# Altium PCB FlightController_Bottom.PcbDoc
Units mm, origin at the board's own origin, x right, y up, seen from the top; angles counter-clockwise.
Board outline 62.23 x 70.48 mm, 2 copper layers (Top Layer, Bottom Layer); 22 components, 39 nets, 124 pads, 48 vias.
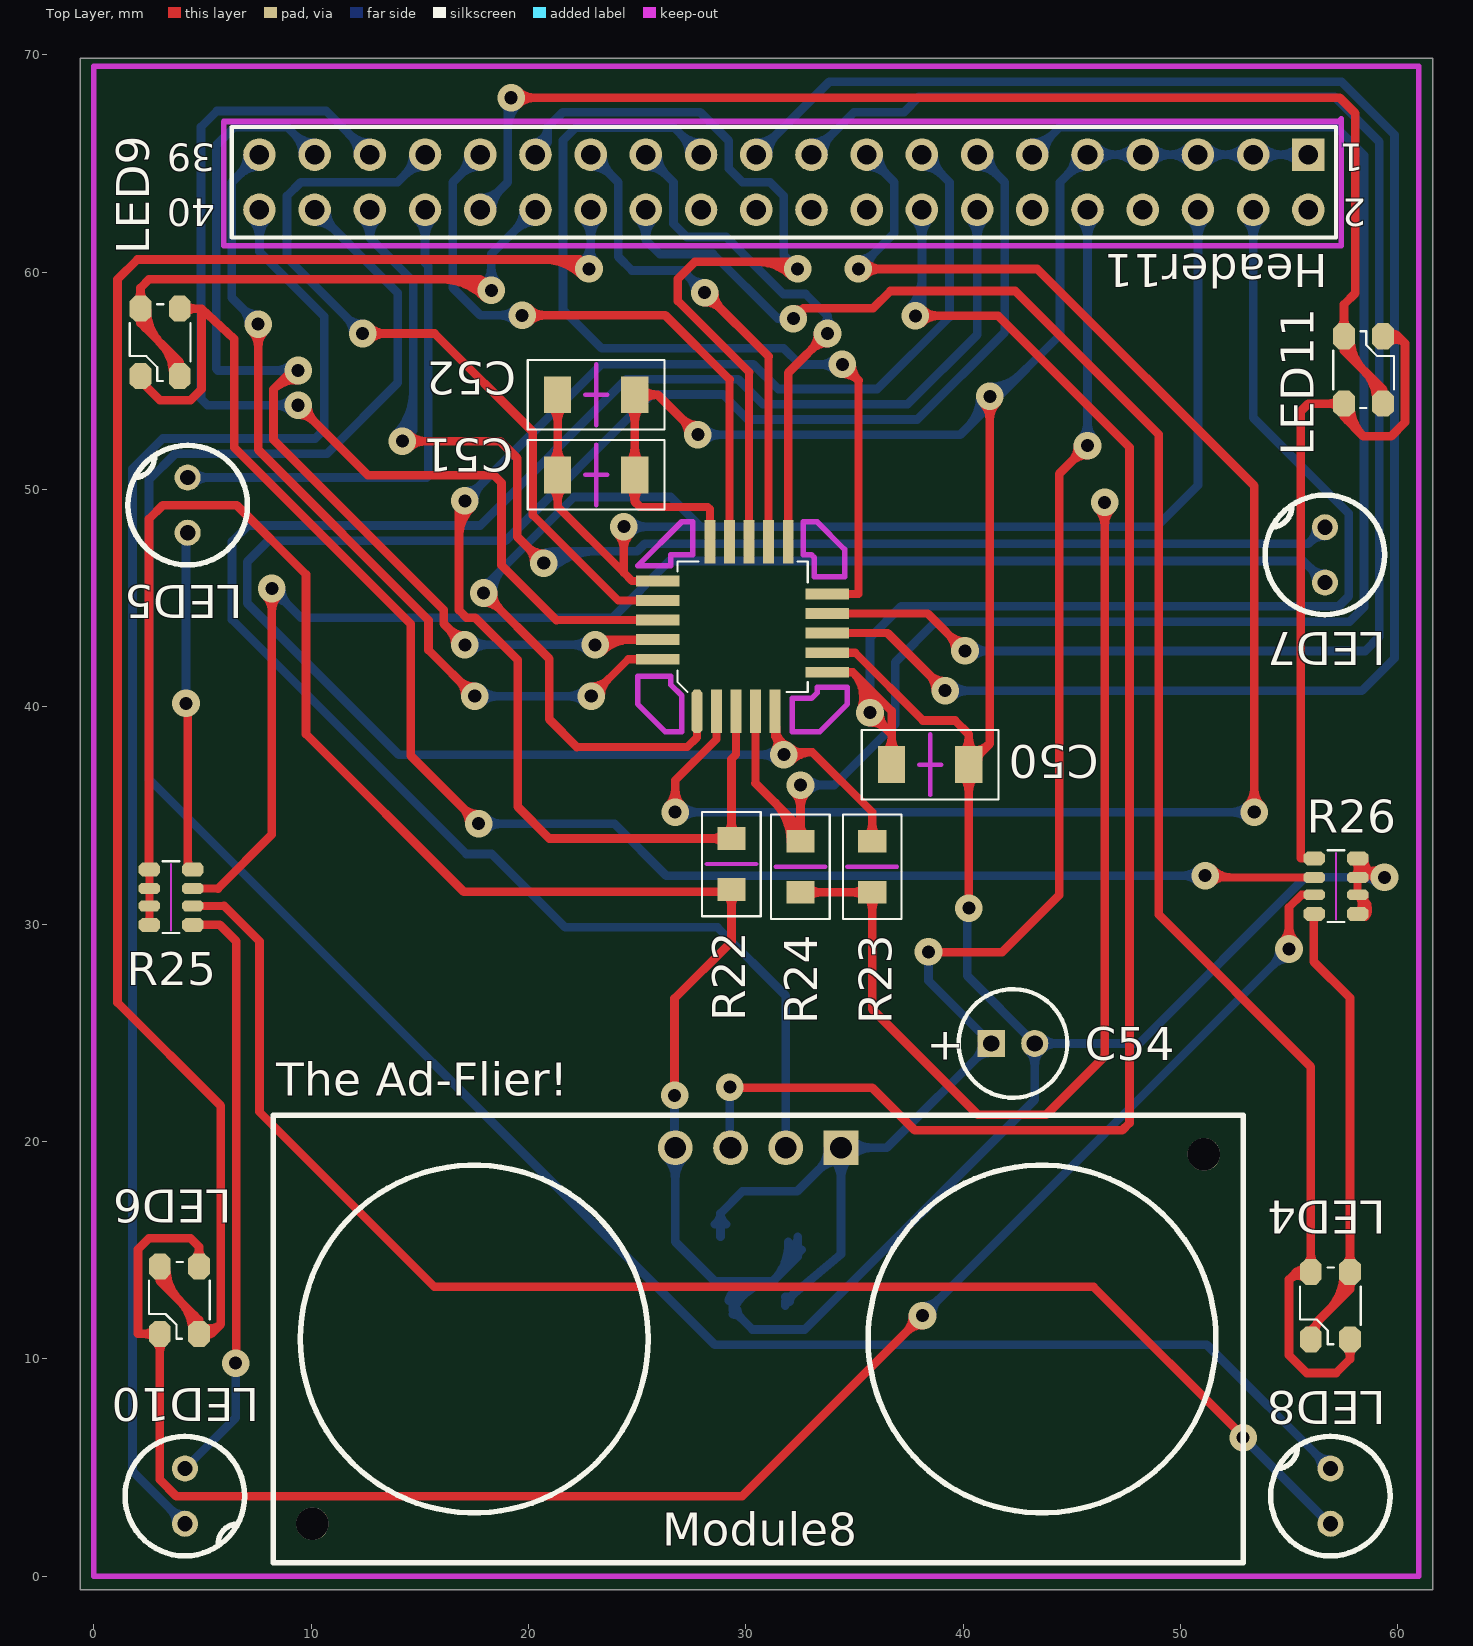
[diagram p0: Top Layer view]
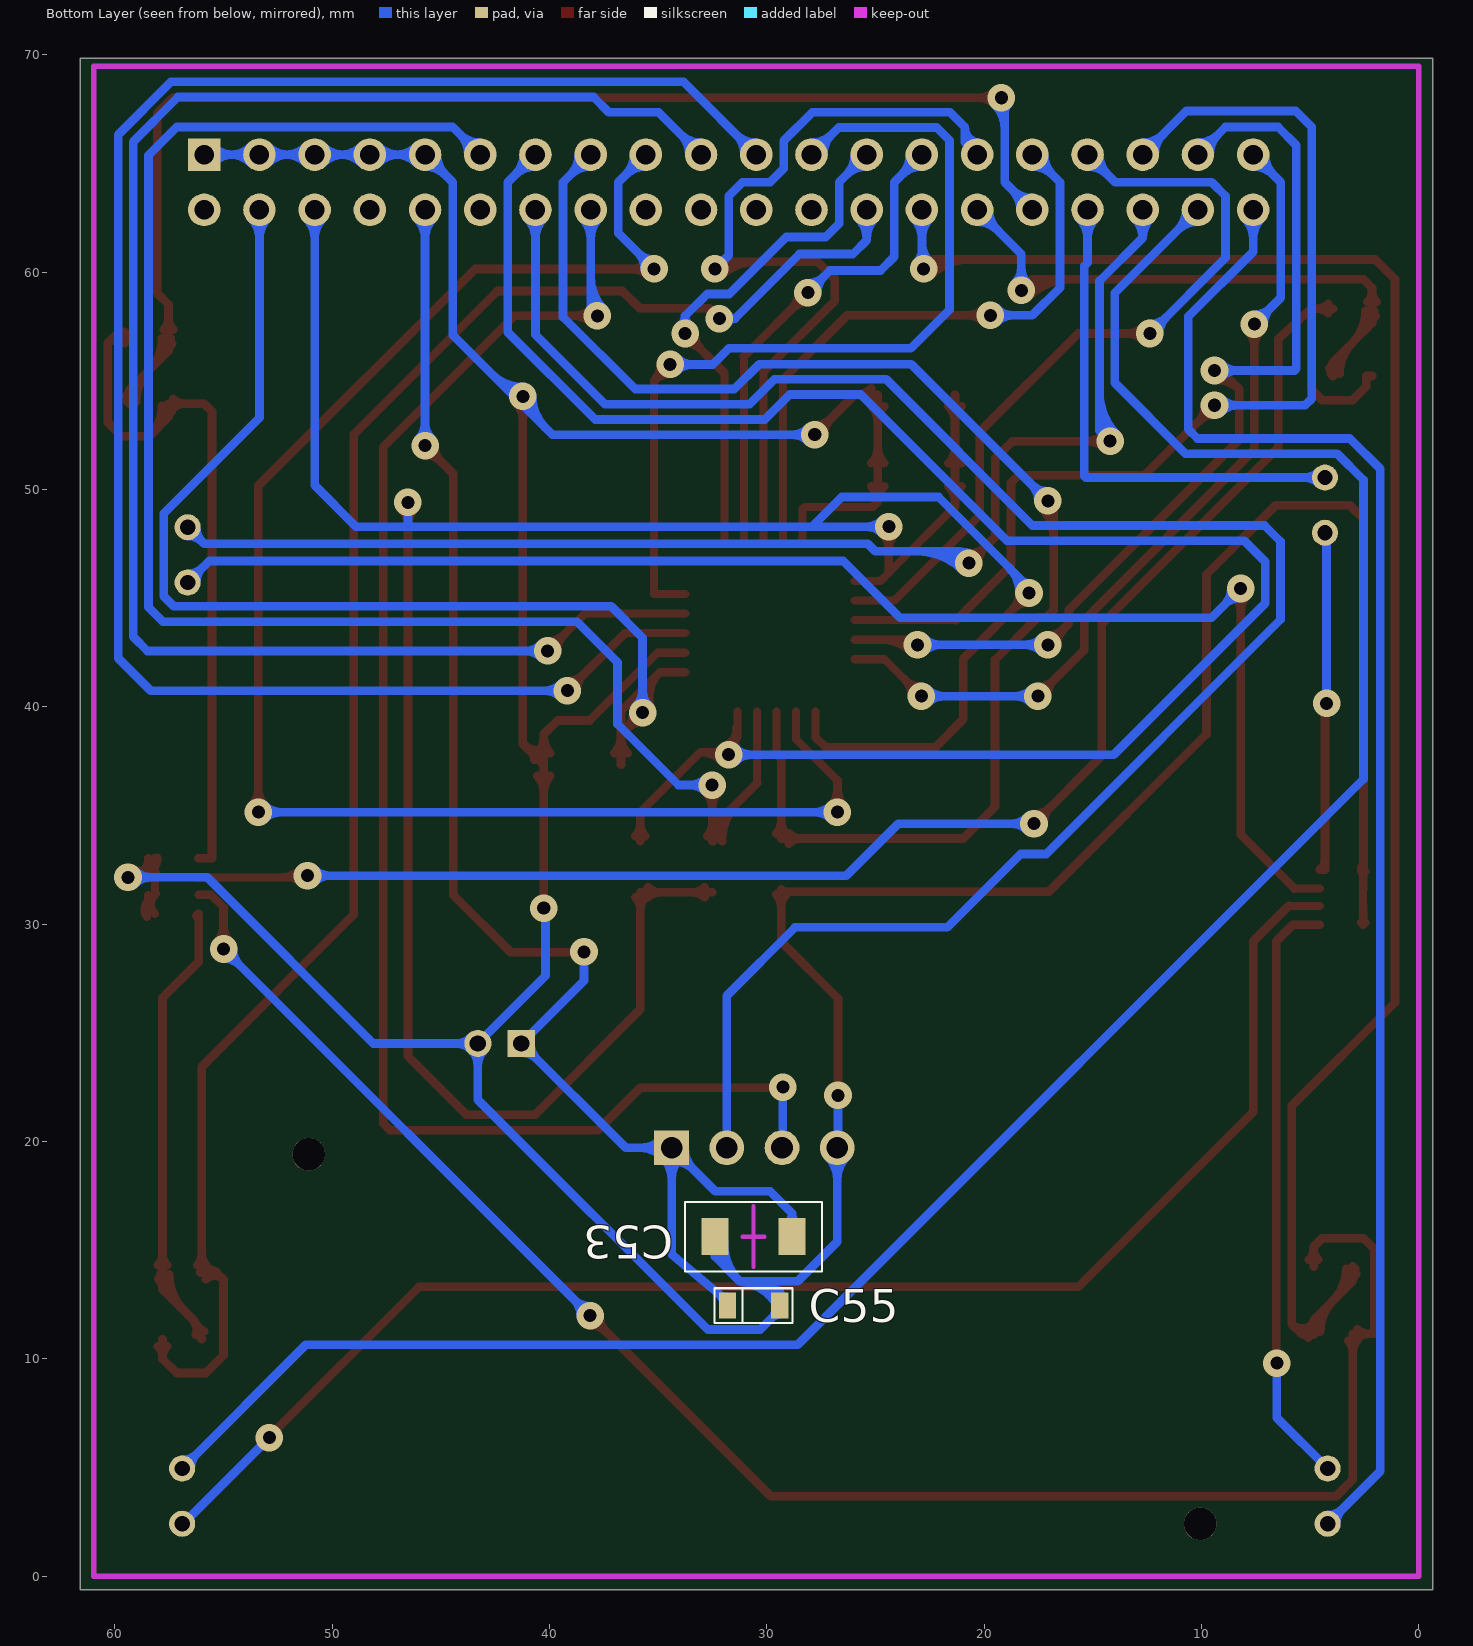
[diagram p1: Bottom Layer view, seen from below]

## Layer stack, top to bottom
Top Layer: signal copper 0.0356
Dielectric: dielectric 0.32, FR-4, Dk 4.8
Bottom Layer: signal copper 0.0356

## Board outline
-0.635,-0.635 -0.635,69.85 61.595,69.85 61.595,-0.635

## Design rules (kind name [scope] priority, off if disabled: settings)
Clearance "Via Clearance" [IsVia vs IsComponent] p1: gap=1
Clearance [All] p2: gap=0.3
ComponentClearance [All] p1: gap=0.254 collisioncheckmode=3 verticalgap=0.254 showdistances=TRUE
PolygonConnect [All] p1: connectstyle=Relief reliefconductorwidth=0.254 reliefentries=4 polygonreliefangle="90 Angle"
RoutingPriority RoutingPriority_CameraDataLines [InNet('/CAMERA_DCLK')] p1: routingpriority=1
RoutingPriority [All] p2: routingpriority=0
RoutingVias [All] p1: holewidth=1 width=1.27 viastyle="Through Hole" minholewidth=1 minwidth=1.27 maxholewidth=1 maxwidth=1.27
SMDNeckDown [All] p1: percent=75.000
SilkscreenOverComponentPads [All] p1: minsilkscreentomaskgap=0.254
SolderMaskExpansion [All] p1: expansion=0.05
Width [All] p1: maxlimit=0.5 minlimit=0.3 preferedwidth=0.4 minimp=50.000000 maximp=50.000000 favimp=50.000000
25 further rules are at their usual default settings.

## Components (designator, comment, footprint, x,y, rotation, side; value= is the part's Value field where it differs from the comment)
C50 "0.1uF SMD 1206" "SMD 1206" 38.481,37.338 r0 top
C51 "0.1uF SMD 1206" "SMD 1206" 23.114,50.673 r0 top
C52 "0.1uF SMD 1206" "SMD 1206" 23.114,54.356 r0 top
C53 "0.1uF SMD 1206" "SMD 1206" 30.607,15.621 r180 bottom
C54 "10uF Electrolitic" CAPPR2-5x5 42.291,24.511 r0 top
C55 "1.0uF Low-ESR Tantalum CaseA" "CAPACITOR - TANTALUM CASE A" 30.607,12.446 r180 bottom
Header11 "Header 20X2H" HDR2X20 55.88,65.405 r180 top
LED4 "LED PLCC-4" "PLCC-4 LED" 56.896,12.446 r90 top
LED5 "LED Blue Through-Hole" "BLUE LED" 4.318,49.276 r90 top
LED6 "LED PLCC-4" "PLCC-4 LED" 3.937,12.7 r90 top
LED7 "LED Blue Through-Hole" "BLUE LED" 56.642,46.99 r90 top
LED8 "LED Blue Through-Hole" "BLUE LED" 56.896,3.683 r90 top
LED9 "LED PLCC-4" "PLCC-4 LED" 3.048,56.769 r90 top
LED10 "LED Blue Through-Hole" "BLUE LED" 4.191,3.683 r270 top
LED11 "LED PLCC-4" "PLCC-4 LED" 58.42,55.499 r270 top
Module8 "HC-SR04 Ultrasonic Module" "HC-SR04 ULTRASONIC RANGER" 8.255,21.209 r0 top
R22 "4.7K SMD 0805" "SMD 0805" 29.337,32.766 r90 top
R23 "4.7K SMD 0805" "SMD 0805" 35.814,32.639 r90 top
R24 "4.7K SMD 0805" "SMD 0805" 32.512,32.639 r270 top
R25 "Value: 10K SMD Resistor Array" "RESISTOR ARRAY YC164" 3.556,31.242 r180 top
R26 "Value: 10K SMD Resistor Array" "RESISTOR ARRAY YC164" 57.15,31.75 r0 top
"The Ad-Flier!" "TCM8230MD" "TCM8230MD CAMERA MODULE" 29.848,43.688 r90 top (schematic designator Module7)

## Footprints (in the part's own frame and the unit in brackets; to place one, negate y for a bottom-side part, rotate by r counter-clockwise, add the part's x,y. Pads: shape width x height; smd on the part's side, far side on the other; paste and mask are expansions set on the pad)
"BLUE LED" [mm]
  round 1.2 hole 0.7: N(-1.27,0) P(1.27,0)
  Mechanical 1 keep-out circle w0.254: c0,0 r2.75
  silkscreen extent -2.75,-2.75 2.75,2.75
"CAPACITOR - TANTALUM CASE A" [mm]
  rect 0.8x1.2 smd: 1(-1.2,0) 2(1.2,0)
  silkscreen extent -1.8,-0.8 1.8,0.8
CAPPR2-5x5 [mm] "Capacitor, Electrolytic, Radial; Body 5 x 5 mm (Dia.xH typ); Pin Spacing 2 mm (typ)"
  rect 1.25x1.25 hole 0.75: 1(-1,0)
  round 1.25 hole 0.75: 2(1,0)
  silkscreen extent -2.5,-2.5 2.5,2.5
"HC-SR04 ULTRASONIC RANGER" [mm]
  rect 1.6x1.6 hole 1: 1(26.12,-1.5)
  round 1.6 hole 1: 2(23.58,-1.5) 3(21.04,-1.5) 4(18.5,-1.5)
  round 1.5 hole 1.5: NC(1.8,-18.8) NC(42.82,-1.8)
  silkscreen extent 0,-20.6 44.62,0
HDR2X20 [mm] "Connector; Header; 20x2 Position"
  rect 1.5x1.5 hole 0.9: 1(0,0)
  round 1.5 hole 0.9: 2(0,2.54) 3(2.54,0) 4(2.54,2.54) 5(5.08,0) 6(5.08,2.54) 7(7.62,0) 8(7.62,2.54) 9(10.16,0) 10(10.16,2.54) 11(12.7,0) 12(12.7,2.54) 13(15.24,0) 14(15.24,2.54) 15(17.78,0) 16(17.78,2.54) 17(20.32,0) 18(20.32,2.54) 19(22.86,0) 20(22.86,2.54) 21(25.4,0) 22(25.4,2.54) 23(27.94,0) 24(27.94,2.54) 25(30.48,0) 26(30.48,2.54) 27(33.02,0) 28(33.02,2.54) 29(35.56,0) 30(35.56,2.54) 31(38.1,0) 32(38.1,2.54) 33(40.64,0) 34(40.64,2.54) 35(43.18,0) 36(43.18,2.54) 37(45.72,0) 38(45.72,2.54) 39(48.26,0) 40(48.26,2.54)
  silkscreen extent -1.27,-1.27 49.53,3.81
"PLCC-4 LED" [mm]
  oct 1.2x1 smd: 1(-1.55,0.9) 2(1.55,0.9) 3(-1.55,-0.9) 4(1.55,-0.9)
  silkscreen extent -1.78,-1.4 1.75,1.4
"RESISTOR ARRAY YC164" [mm]
  oct 1x0.65 smd: 1(-1,1.275) 4(-1,-1.275) 5(1,-1.275) 8(1,1.275)
  oct 1x0.5 smd: 2(-1,0.4) 3(-1,-0.4) 6(1,-0.4) 7(1,0.4)
  Top Layer keep-out lines w0.1: 0,1.524 0,-1.524
  Mechanical 1 keep-out lines w0.1: 1.905,1.905 1.905,-1.905 -1.905,-1.905 -1.905,1.905 1.905,1.905
  silkscreen extent -0.38,-1.65 0.38,1.65
"SMD 0805" [mm]
  rect 1.05x1.3 smd: 1(-1.175,0) 2(1.175,0)
  Top Layer keep-out lines w0.2: 0,1.143 0,-1.143
  Mechanical 1 keep-out lines w0.1: -2.4,1.35 -2.4,0 -2.4,-1.35 2.4,-1.35 2.4,1.35 -2.4,1.35
  silkscreen extent -2.4,-1.35 2.4,1.35
"SMD 1206" [mm]
  rect 1.25x1.7 smd: 1(-1.775,0) 2(1.775,0)
  Top Layer keep-out lines w0.2: -0.508,0 0.508,0 ; 0,-1.397 0,1.397
  Mechanical 1 keep-out lines w0.1: -3.15,-1.6 -3.15,0 -3.15,1.6 3.15,1.6 3.15,-1.6 -3.15,-1.6
  silkscreen extent -3.15,-1.6 3.15,1.6
"TCM8230MD CAMERA MODULE" [mm]
  oct 2x0.5 smd: 1(-3.9,2.1)
  rect 2x0.5 smd: 2(-3.9,1.2) 3(-3.9,0.3) 4(-3.9,-0.6) 5(-3.9,-1.5) 11(3.9,-2.1) 12(3.9,-1.2) 13(3.9,-0.3) 14(3.9,0.6) 15(3.9,1.5)
  rect 0.5x2 smd: 6(-2.1,-3.9) 7(-1.2,-3.9) 8(-0.3,-3.9) 9(0.6,-3.9) 10(1.5,-3.9) 16(2.1,3.9) 17(1.2,3.9) 18(0.3,3.9) 19(-0.6,3.9) 20(-1.5,3.9)
  silkscreen extent -3,-3 3,3

## Part data
C50 C51 C52 C53: library part Cap, "Capacitor"
C54: library part "Cap Pol1", "Polarized Capacitor (Radial)"
C55: library part SMD_Cap_Tantalum, "Tantalum Capacitor - Case A"
Header11: "Header, 20-Pin, Dual row, Right Angle"
LED4 LED6 LED9 LED11: library part HSMF-C157, "Surface Mount Chip LED"
LED5 LED7 LED8 LED10: library part LED0, "Typical INFRARED GaAs LED"
R22 R23 R24: library part Res2, "Resistor"
R25 R26: library part "SMD Resistor Array", "4-Count Resistor Array"
"The Ad-Flier!": "Toshiba 640x480 Camera"

## Via types
v1: diameter 1.27, hole 0.6, Top Layer to Bottom Layer, 48 vias

## Nets (pads, with @x,y where several pads share a name; then routed paths per layer and width w, separated by ;. In a path a pad name is that pad's centre, name@x,y a point inside that pad or via, vN(x,y) a via of type N, cw(c..) or ccw(c..) an arc to the next point about the centre after c; other vN are vias at no path point)
/+1.2V: Header11.2
/+1.5V: "The Ad-Flier!.6" C50.1 Header11.4 | length 65.1
  Top Layer w0.375: 33.748,41.588 34.925,41.588 ; v1@35.293,39.886 ccw(c33.788,40.451) 34.925,41.588 ; 35.337,41.176 cw(c34.387,40.226) v1@35.645,39.754 ; 35.748,40.765 cw(c34.985,40.002) v1@35.996,39.622 ; 36.706,39.807 34.925,41.588
  Top Layer w0.4: v1@35.712,39.294 cw(c35.712,38.243) 36.455,38.986 cw(c37.198,39.729) v1@36.147,39.729 ; v1(35.712,39.729) 36.706,38.735 ; C50.1@36.405,37.864 ccw(c35.68,38.589) 36.706,38.589 ccw(c37.732,38.589) C50.1@37.007,37.864 ; C50.1 36.706,38.735 ; 36.706,39.807 36.706,38.735
  Bottom Layer w0.4: v1@35.405,40.036 ccw(c34.662,40.779) 35.712,40.779 ccw(c36.763,40.779) v1@36.02,40.036 ; v1(35.712,39.729) 35.712,43.18 37.152,44.62 57.277,44.62 57.742,45.085 57.742,48.895 53.34,53.297 Header11.4 ; Header11.4@52.951,62.476 cw(c52.012,61.537) 53.34,61.537 cw(c54.668,61.537) Header11.4@53.729,62.476
/+2.8V: "The Ad-Flier!.1" "The Ad-Flier!.16" C51.1 C52.1 Header11.6 R23.1 R24.2 | length 149.4
  Top Layer w0.375: 21.339,49.214 24.384,46.169 ; 22.225,38.151 27.305,38.151 27.748,38.594 27.748,39.788 ; v1@24.068,47.969 cw(c23.304,47.205) 24.384,47.205 cw(c25.464,47.205) v1@24.7,47.969 ; v1(24.384,48.285) 24.384,46.169 ; 25.948,45.788 24.765,45.788 24.384,46.169
  Top Layer w0.4: v1@17.932,44.802 cw(c17.932,43.752) 18.675,44.495 cw(c19.418,45.237) v1@18.367,45.237 ; v1(17.932,45.237) 20.955,42.215 20.955,39.421 22.225,38.151 ; C51.1@21.038,50.147 cw(c20.313,49.422) 21.339,49.422 cw(c22.365,49.422) C51.1@21.64,50.147 ; C51.1@21.038,51.199 ccw(c20.313,51.924) 21.339,51.924 ccw(c22.365,51.924) C51.1@21.64,51.199 ; C52.1@21.038,53.83 cw(c20.313,53.105) 21.339,53.105 cw(c22.365,53.105) C52.1@21.64,53.83 ; 21.339,49.214 C51.1 C52.1 ; R24.2 R23.1 35.814,26.086 40.665,21.234 43.815,21.234 46.507,23.927 v1(46.507,49.403) ; R24.2@32.867,31.234 cw(c33.422,30.679) 33.422,31.464 cw(c33.422,32.249) R24.2@32.867,31.694 ; R23.1@35.459,31.234 ccw(c34.904,30.679) 34.904,31.464 ccw(c34.904,32.249) R23.1@35.459,31.694 ; R23.1@35.584,31.234 cw(c35.029,30.679) 35.814,30.679 cw(c36.599,30.679) R23.1@36.044,31.234 ; v1@46.2,49.095 cw(c45.457,48.353) 46.507,48.353 cw(c47.558,48.353) v1@46.815,49.095
  Bottom Layer w0.4: v1(17.932,45.237) 17.932,45.493 22.096,49.657 26.543,49.657 27.915,48.285 ; v1@17.932,45.672 ccw(c17.932,46.105) 18.238,45.799 ; v1@18.367,45.237 cw(c20.035,45.237) 18.856,46.417 ; v1(24.384,48.285) 27.915,48.285 ; v1@24.692,47.978 cw(c25.434,47.235) 25.434,48.285 cw(c25.434,49.336) v1@24.692,48.593 ; 46.507,48.311 v1(46.507,49.403) ; Header11.6@50.411,62.476 cw(c49.472,61.537) 50.8,61.537 cw(c52.128,61.537) Header11.6@51.189,62.476 ; Header11.6 50.8,50.19 48.895,48.285 27.915,48.285
/+3.3V: Header11.8
/+5.0V: C53.2 C54.1 C55.1 Header11.10 Module8.1 | length 85.6
  Top Layer w0.4: v1@38.354,28.702 41.783,28.702 44.425,31.344 44.425,50.724 v1(45.72,52.019) ; v1@45.285,52.019 cw(c44.235,52.019) 44.977,51.277 cw(c45.72,50.534) v1@45.72,51.584
  Bottom Layer w0.4: C53.2@28.579,16.187 ccw(c28.205,16.691) 28.832,16.691 ; C53.2 28.832,16.691 ; C53.2@29.085,16.187 cw(c29.459,16.691) 28.832,16.691 ; C55.1 31.807,12.649 34.375,14.817 Module8.1 ; C55.1@31.824,12.845 ccw(c31.864,13.318) C55.1@32.17,12.956 ; C55.1@32.006,12.629 cw(c32.496,12.588) C55.1@32.179,12.963 ; Module8.1@33.775,19.709 cw(c32.326,19.709) 33.351,18.685 cw(c34.375,17.66) Module8.1@34.375,19.109 ; Module8.1@33.951,19.285 cw(c32.926,18.26) 34.375,18.26 cw(c35.824,18.26) 34.799,19.285 cw(c35.824,18.26) 35.824,19.709 cw(c35.824,21.158) Module8.1@34.799,20.133 ; v1(38.405,28.727) 38.405,27.397 C54.1 36.489,19.709 Module8.1 ; C54.1@40.866,24.511 cw(c39.84,24.511) 40.565,23.785 cw(c41.291,23.06) C54.1@41.291,24.086 ; Header11.10@45.331,62.476 cw(c44.392,61.537) 45.72,61.537 cw(c47.048,61.537) Header11.10@46.109,62.476 ; v1@45.412,52.327 ccw(c44.67,53.069) 45.72,53.069 ccw(c46.77,53.069) v1@46.028,52.327 ; v1(45.72,52.019) Header11.10 ; 28.832,16.691 29.845,17.704 32.37,17.704 Module8.1
/BLED_BLUE1: Header11.34 LED5.P | length 27
  Bottom Layer w0.4: LED5.P 15.316,50.546 15.39,50.62 15.39,60.285 15.24,60.435 Header11.34 ; LED5.P@4.601,50.263 cw(c5.284,49.58) 5.284,50.546 cw(c5.284,51.512) LED5.P@4.601,50.829 ; Header11.34@14.851,62.476 cw(c13.912,61.537) 15.24,61.537 cw(c16.568,61.537) Header11.34@15.629,62.476
/BLED_BLUE2: Header11.36 LED7.P | length 74.1
  Top Layer w0.4: v1(14.199,52.222) 18.694,52.222 19.482,51.435 19.482,47.828 v1(20.701,46.609) ; v1@14.506,51.915 cw(c15.249,51.172) 15.249,52.222 cw(c15.249,53.273) v1@14.506,52.53 ; v1@20.266,46.609 ccw(c19.216,46.609) 19.958,47.352 ccw(c20.701,48.094) v1@20.701,47.044
  Bottom Layer w0.4: Header11.36@12.32,62.467 cw(c11.47,61.578) 12.7,61.578 ; Header11.36 12.7,61.578 ; Header11.36@13.08,62.467 ccw(c13.93,61.578) 12.7,61.578 ; v1@13.891,52.53 ccw(c11.962,54.459) 14.69,54.459 ; v1@14.174,52.247 ccw(c12.928,53.493) 14.69,53.493 ; v1(14.199,52.222) 14.69,52.714 14.69,59.588 12.7,61.578 ; v1@20.443,46.867 cw(c21.127,46.183) 21.127,47.15 ; v1(20.701,46.609) 21.242,47.15 25.002,47.15 25.349,47.498 55.88,47.498 LED7.P ; v1@20.726,46.584 cw(c22.092,45.218) 22.092,47.15 ; v1@21.009,46.301 cw(c23.058,44.252) 23.058,47.15 ; LED7.P@56.242,48.26 cw(c55.276,48.26) 55.959,47.577 cw(c56.642,46.894) LED7.P@56.642,47.86
/BLED_BLUE3: Header11.38 LED8.P | length 107.7
  Bottom Layer w0.4: Header11.38@10.16,62.315 cw(c10.16,60.987) 11.099,61.926 cw(c12.038,62.865) Header11.38@10.71,62.865 ; Header11.38 13.99,59.035 13.99,54.907 10.729,51.646 3.746,51.646 2.54,50.44 2.54,36.678 28.572,10.646 51.203,10.646 LED8.P ; LED8.P@56.496,4.953 ccw(c55.53,4.953) 56.213,5.636 ccw(c56.896,6.319) LED8.P@56.896,5.353
/BLED_BLUE4: Header11.40 LED10.P | length 74
  Bottom Layer w0.4: LED10.P@3.791,2.413 ccw(c2.825,2.413) 3.508,3.096 ccw(c4.191,3.779) LED10.P@4.191,2.813 ; LED10.P 1.778,4.826 1.778,50.949 3.175,52.346 10.182,52.346 10.6,52.764 10.6,57.955 7.62,60.935 Header11.40 ; Header11.40@7.231,62.476 cw(c6.292,61.537) 7.62,61.537 cw(c8.948,61.537) Header11.40@8.009,62.476
/BLED_ORANGE1: Header11.26 LED4.2 LED4.3 | length 88.7
  Top Layer w0.4: v1(32.182,57.861) 32.651,58.331 ; v1@32.341,58.266 ccw(c32.447,58.535) 32.651,58.331 ; v1@32.587,58.02 cw(c32.856,58.126) 32.651,58.331 ; 55.289,13.95 cw(c55.686,13.553) LED4.2@56.063,13.97 ; LED4.2@55.77,13.798 ccw(c55.335,13.417) 55.335,13.996 ccw(c55.335,14.575) LED4.2@55.77,14.194 ; LED4.2@55.784,14.308 ccw(c55.272,14.82) 55.996,14.82 ccw(c56.72,14.82) LED4.2@56.208,14.308 ; LED4.2@55.795,13.673 ccw(c55.404,13.24) 54.991,13.653 ; LED4.3@57.584,10.584 cw(c57.072,10.072) 57.796,10.072 cw(c58.52,10.072) LED4.3@58.008,10.584 ; LED4.3 57.796,9.993 57.15,9.347 55.804,9.347 54.991,10.16 54.991,13.652 ; 32.651,58.331 35.848,58.331 36.652,59.135 42.389,59.135 48.997,52.527 48.997,30.444 55.996,23.444 LED4.2 55.335,13.996 54.991,13.652
  Bottom Layer w0.4: Header11.26@25.011,62.476 cw(c24.072,61.537) 25.4,61.537 cw(c26.728,61.537) Header11.26@25.789,62.476 ; Header11.26 25.4,61.468 26.035,60.833 28.491,60.833 31.463,57.861 ; v1@31.797,57.659 ccw(c31.463,57.484) 31.463,57.861 ; v1@31.797,58.063 cw(c31.463,58.238) 31.463,57.861 ; v1(32.182,57.861) 31.463,57.861
/BLED_ORANGE2: Header11.28 LED6.2 LED6.3 | length 95.8
  Top Layer w0.4: LED6.2@2.869,13.901 cw(c2.656,13.586) 3.037,13.586 ; LED6.2@2.937,14.15 ccw(c4.058,14.15) 3.265,13.357 ; LED6.2 3.037,13.586 ; LED6.2@3.205,13.901 ccw(c3.418,13.586) 3.037,13.586 ; LED6.2@3.337,14.15 ccw(c5.424,14.15) 3.948,12.674 ; 3.946,12.676 cw(c2.52,11.25) LED6.3@4.537,11.25 ; 4.629,11.994 cw(c3.885,11.25) LED6.3@4.937,11.25 ; LED6.3@4.68,11.506 ccw(c4.509,11.786) 4.837,11.786 ; LED6.3@4.783,11.166 ccw(c5.089,11.644) 5.49,11.243 ; LED6.3@4.994,11.506 cw(c5.165,11.786) 4.837,11.786 ; LED6.3@4.999,11.503 ccw(c5.363,12.073) 5.842,11.594 ; LED6.3@5.087,10.984 cw(c5.397,10.776) 5.397,11.15 ; LED6.3@5.087,11.316 ccw(c5.397,11.523) 5.397,11.15 ; 20.691,60.579 cw(c20.691,58.055) v1@22.476,59.84 ; 21.657,60.579 cw(c21.657,59.02) v1@22.759,60.122 ; v1(22.784,60.147) 22.352,60.579 2.007,60.579 1.092,59.665 1.092,26.391 5.842,21.641 5.842,11.594 ; 3.037,13.586 4.837,11.786 ; 4.837,11.786 LED6.3 5.397,11.15 ; 5.397,11.15 5.842,11.594
  Bottom Layer w0.4: Header11.28@22.471,62.476 cw(c21.532,61.537) 22.86,61.537 cw(c24.188,61.537) Header11.28@23.249,62.476 ; v1@22.476,60.455 ccw(c21.55,61.381) 22.86,61.381 ; v1(22.784,60.147) 22.86,60.223 Header11.28 ; 22.86,61.013 ccw(c23.65,61.013) v1@23.091,60.455
/BLED_ORANGE3: Header11.30 LED9.2 LED9.3 | length 41.5
  Top Layer w0.4: LED9.2@1.936,58.631 ccw(c1.424,59.143) 2.148,59.143 ccw(c2.872,59.143) LED9.2@2.36,58.631 ; LED9.2@1.98,57.97 cw(c1.767,57.655) 2.148,57.655 ; LED9.2@2.048,58.219 ccw(c3.169,58.219) 2.376,57.426 ; LED9.2@2.316,57.97 ccw(c2.529,57.655) 2.148,57.655 ; LED9.2@2.448,58.219 ccw(c4.535,58.219) 3.059,56.743 ; 3.057,56.745 cw(c1.631,55.319) LED9.3@3.648,55.319 ; 3.74,56.063 cw(c2.996,55.319) LED9.3@4.048,55.319 ; LED9.3@3.791,55.575 ccw(c3.62,55.855) 3.948,55.855 ; LED9.3 3.948,55.855 ; LED9.3@4.105,55.575 cw(c4.276,55.855) 3.948,55.855 ; 16.011,59.665 cw(c16.011,56.88) v1@17.98,58.849 ; 16.977,59.665 cw(c16.977,57.846) v1@18.263,59.132 ; v1@17.873,59.287 ccw(c17.514,59.399) 17.78,59.665 ; v1@18.158,59.572 cw(c18.046,59.93) 17.78,59.665 ; v1(18.288,59.157) 17.78,59.665 ; 2.148,57.655 3.948,55.855 ; 2.148,57.655 LED9.2 2.148,59.273 2.54,59.665 17.78,59.665
  Bottom Layer w0.4: v1@17.98,59.464 ccw(c17.238,60.207) 18.288,60.207 ccw(c19.338,60.207) v1@18.596,59.464 ; v1(18.288,59.157) 18.288,60.833 Header11.30 ; Header11.30@19.77,62.865 cw(c18.442,62.865) 19.381,61.926 cw(c20.32,60.987) Header11.30@20.32,62.315
/BLED_ORANGE4: Header11.32 LED11.2 LED11.3 | length 72.1
  Top Layer w0.4: v1(19.202,68.021) 57.328,68.021 58.039,67.31 58.039,59.03 57.52,58.511 LED11.3 57.52,56.385 ; v1@19.51,67.714 cw(c20.253,66.971) 20.253,68.021 cw(c20.253,69.071) v1@19.51,68.329 ; LED11.3@57.308,57.361 ccw(c56.796,57.873) 57.52,57.873 ccw(c58.244,57.873) LED11.3@57.732,57.361 ; LED11.3@57.352,56.7 cw(c57.139,56.385) 57.52,56.385 ; LED11.3@57.42,56.949 ccw(c58.541,56.949) 57.748,56.156 ; LED11.3@57.688,56.7 ccw(c57.901,56.385) 57.52,56.385 ; LED11.3@57.82,56.949 ccw(c59.907,56.949) 58.431,55.473 ; 58.429,55.475 cw(c57.003,54.049) LED11.2@59.02,54.049 ; 59.112,54.793 cw(c58.368,54.049) LED11.2@59.42,54.049 ; LED11.2@59.163,54.305 ccw(c58.992,54.585) 59.32,54.585 ; LED11.2 59.32,54.585 ; LED11.2@59.477,54.305 cw(c59.648,54.585) 59.32,54.585 ; 57.52,56.385 59.32,54.585
  Bottom Layer w0.4: Header11.32 19.05,64.135 19.05,67.869 v1(19.202,68.021) ; Header11.32@17.78,63.415 ccw(c17.78,64.743) 18.719,63.804 ccw(c19.658,62.865) Header11.32@18.33,62.865 ; v1@18.895,67.714 cw(c18.52,67.339) 19.05,67.339 ; 19.05,66.603 cw(c20.621,66.603) v1@19.51,67.714
/CAMERA_DCLK: "The Ad-Flier!.10" Header11.23 | length 46.5
  Top Layer w0.375: 33.748,45.188 35.179,45.188 35.179,55.016
  Top Layer w0.4: v1(34.442,55.753) 35.179,55.016 ; v1@34.445,55.318 cw(c34.451,54.288) 35.179,55.016 ; v1@34.877,55.75 ccw(c35.907,55.745) 35.179,55.016
  Bottom Layer w0.4: Header11.23@27.39,65.405 ccw(c26.062,65.405) 27.001,66.344 ccw(c27.94,67.283) Header11.23@27.94,65.955 ; Header11.23 26.69,66.655 22.18,66.655 21.59,66.065 21.59,58.268 23.368,56.49 31.75,56.49 32.487,55.753 v1(34.442,55.753) ; v1@34.135,55.445 ccw(c33.392,54.703) 33.392,55.753 ccw(c33.392,56.803) v1@34.135,56.061
/CAMERA_DOUT0: "The Ad-Flier!.11" Header11.25 | length 28.5
  Top Layer w0.375: 31.948,47.588 31.948,55.367
  Top Layer w0.4: 31.948,55.367 v1(33.757,57.175) ; v1@33.322,57.175 cw(c32.271,57.175) 33.014,56.433 cw(c33.757,55.69) v1@33.757,56.74
  Bottom Layer w0.4: Header11.25@25.4,64.855 cw(c25.4,63.527) 26.339,64.466 cw(c27.278,65.405) Header11.25@25.95,65.405 ; Header11.25 26.67,64.135 26.67,62.23 27.287,61.613 29.103,61.613 31.72,58.996 32.741,58.996 33.757,57.98 ; v1@33.518,57.539 ccw(c33.23,57.98) 33.757,57.98 ; v1(33.757,57.175) 33.757,57.98 ; v1@33.995,57.539 cw(c34.284,57.98) 33.757,57.98
/CAMERA_DOUT1: "The Ad-Flier!.12" Header11.27 | length 28
  Top Layer w0.375: 31.048,47.588 31.048,56.114
  Top Layer w0.4: v1@28.107,58.62 cw(c28.107,57.57) 28.85,58.312 cw(c29.593,59.055) v1@28.542,59.055 ; v1(28.107,59.055) 31.048,56.114
  Bottom Layer w0.4: Header11.27@22.86,64.855 cw(c22.86,63.527) 23.799,64.466 cw(c24.738,65.405) Header11.27@23.41,65.405 ; Header11.27 24.13,64.135 24.13,60.706 24.765,60.071 27.091,60.071 v1(28.107,59.055) ; v1@27.672,59.055 ccw(c26.622,59.055) 27.365,59.798 ccw(c28.107,60.54) v1@28.107,59.49
/CAMERA_DOUT2: "The Ad-Flier!.13" Header11.29 | length 42.7
  Top Layer w0.375: 30.148,47.588 30.148,55.399
  Top Layer w0.4: 30.148,55.399 26.873,58.674 26.873,59.69 27.661,60.477 32.055,60.477 v1(32.385,60.147) ; 30.538,60.477 cw(c30.538,58.3) v1@32.077,59.84 ; 31.503,60.477 cw(c31.503,59.266) v1@32.36,60.122
  Bottom Layer w0.4: Header11.29@20.251,65.951 ccw(c20.16,66.675) 20.89,66.675 ; Header11.29@20.301,65.554 ccw(c20.217,66.221) 20.89,66.221 ; Header11.29 20.89,65.975 20.89,66.675 ; v1(32.385,60.147) 31.75,60.782 31.75,63.5 31.115,64.135 29.845,64.135 29.21,64.77 29.21,66.04 27.895,67.355 21.57,67.355 20.89,66.675
/CAMERA_DOUT3: "The Ad-Flier!.14" Header11.31 | length 34
  Top Layer w0.375: 29.248,47.588 29.248,55.055
  Top Layer w0.4: v1(19.71,58.014) 26.289,58.014 29.248,55.055 ; v1@20.018,57.706 cw(c20.761,56.963) 20.761,58.014 cw(c20.761,59.064) v1@20.018,58.321
  Bottom Layer w0.4: Header11.31@17.23,65.405 cw(c15.902,65.405) 16.841,64.466 cw(c17.78,63.527) Header11.31@17.78,64.855 ; Header11.31 16.51,64.135 16.51,59.284 17.78,58.014 v1(19.71,58.014) ; v1@19.403,57.706 ccw(c18.66,56.963) 18.66,58.014 ccw(c18.66,59.064) v1@19.403,58.321
/CAMERA_DOUT4: "The Ad-Flier!.17" Header11.33 | length 41.2
  Top Layer w0.375: 20.196,48.821 24.129,44.888 25.948,44.888
  Top Layer w0.4: v1(12.37,57.175) 15.673,57.175 20.196,52.652 20.196,48.821 ; v1@12.677,56.868 cw(c13.42,56.125) 13.42,57.175 cw(c13.42,58.226) v1@12.677,57.483
  Bottom Layer w0.4: v1@11.935,57.175 ccw(c10.885,57.175) 11.627,57.918 ccw(c12.37,58.661) v1@12.37,57.61 ; v1(12.37,57.175) 8.89,60.655 8.89,63.5 9.525,64.135 13.97,64.135 Header11.33 ; Header11.33@14.69,65.405 cw(c13.362,65.405) 14.301,64.466 cw(c15.24,63.527) Header11.33@15.24,64.855
/CAMERA_DOUT5: "The Ad-Flier!.18" Header11.35 | length 54.3
  Top Layer w0.375: 21.284,43.988 25.948,43.988
  Top Layer w0.4: v1@9.398,53.438 cw(c9.398,52.388) 10.141,53.131 cw(c10.883,53.873) v1@9.833,53.873 ; v1(9.398,53.873) 12.616,50.656 18.413,50.656 18.761,50.308 18.761,46.512 21.284,43.988
  Bottom Layer w0.4: v1@9.09,53.566 ccw(c8.348,52.823) 8.348,53.873 ccw(c8.348,54.924) v1@9.09,54.181 ; v1(9.398,53.873) 5.232,53.873 4.928,54.178 4.928,66.675 5.664,67.412 10.693,67.412 Header11.35 ; Header11.35@12.15,65.405 ccw(c10.822,65.405) 11.761,66.344 ccw(c12.7,67.283) Header11.35@12.7,65.955
/CAMERA_DOUT6: "The Ad-Flier!.19" Header11.37 | length 57.5
  Top Layer w0.375: v1@23.114,42.799 cw(c23.813,42.1) 23.813,43.088 ; v1@23.301,43.088 25.948,43.088 ; v1@23.38,42.533 cw(c24.719,41.194) 24.719,43.088
  Top Layer w0.4: v1@9.376,55.039 ccw(c9.303,53.57) 8.263,54.61 ; v1(9.398,55.474) 9.127,55.474 8.263,54.61 ; v1@16.634,42.85 ccw(c15.584,42.85) 16.326,43.592 ccw(c17.069,44.335) v1@17.069,43.285 ; v1(17.069,42.85) 16.097,43.821 16.097,44.456 8.263,52.291 8.263,54.61 ; v1(23.063,42.85) v1@23.301,43.088
  Bottom Layer w0.4: v1@9.09,55.166 ccw(c8.348,54.423) 8.348,55.474 ccw(c8.348,56.524) v1@9.09,55.781 ; v1(9.398,55.474) 5.715,55.474 5.639,55.55 5.639,65.837 6.477,66.675 8.89,66.675 Header11.37 ; Header11.37@9.61,65.405 ccw(c8.282,65.405) 9.221,66.344 ccw(c10.16,67.283) Header11.37@10.16,65.955 ; v1(17.069,42.85) v1(23.063,42.85) ; v1@17.376,42.542 cw(c18.119,41.8) 18.119,42.85 cw(c18.119,43.9) v1@17.376,43.157 ; v1@22.756,42.542 ccw(c22.013,41.8) 22.013,42.85 ccw(c22.013,43.9) v1@22.756,43.157
/CAMERA_DOUT7: "The Ad-Flier!.20" Header11.39 | length 51.2
  Top Layer w0.375: v1(22.887,40.488) 24.587,42.188 25.948,42.188 ; v1@22.887,40.935 ccw(c22.887,42.015) 23.651,41.252 ccw(c24.415,40.488) v1@23.334,40.488
  Top Layer w0.4: v1@7.255,57.3 cw(c6.513,56.557) 7.563,56.557 cw(c8.613,56.557) v1@7.871,57.3 ; v1(7.563,57.607) 7.563,51.82 15.397,43.986 15.397,42.616 v1(17.526,40.488) ; v1@17.091,40.488 ccw(c16.041,40.488) 16.783,41.23 ccw(c17.526,41.973) v1@17.526,40.923
  Bottom Layer w0.4: Header11.39@7.07,65.405 cw(c5.742,65.405) 6.681,64.466 cw(c7.62,63.527) Header11.39@7.62,64.855 ; v1@7.128,57.607 ccw(c6.078,57.607) 6.82,58.35 ccw(c7.563,59.092) v1@7.563,58.042 ; v1(7.563,57.607) 6.35,58.82 6.35,64.135 Header11.39 ; v1(17.526,40.488) v1(22.887,40.488) ; v1@17.834,40.18 cw(c18.576,39.437) 18.576,40.488 cw(c18.576,41.538) v1@17.834,40.795 ; v1@22.579,40.18 ccw(c21.837,39.437) 21.837,40.488 ccw(c21.837,41.538) v1@22.579,40.795
/CAMERA_EXTCLK: "The Ad-Flier!.2" Header11.17 | length 87.9
  Top Layer w0.375: 26.746,36.605 28.648,38.506 28.648,39.788
  Top Layer w0.4: v1@26.439,35.461 ccw(c25.696,36.204) 26.746,36.204 ccw(c27.796,36.204) v1@27.054,35.461 ; v1(26.746,35.154) 26.746,36.605 ; v1(35.179,60.147) 43.409,60.147 53.391,50.165 v1(53.391,35.154) ; v1@35.487,59.84 cw(c36.229,59.097) 36.229,60.147 cw(c36.229,61.197) v1@35.487,60.455 ; v1@53.083,35.461 ccw(c52.341,36.204) 53.391,36.204 ccw(c54.441,36.204) v1@53.698,35.461
  Bottom Layer w0.4: v1(26.746,35.154) v1(53.391,35.154) ; v1@27.054,34.846 cw(c27.796,34.103) 27.796,35.154 cw(c27.796,36.204) v1@27.054,35.461 ; v1(35.179,60.147) 36.83,61.798 36.83,64.135 Header11.17 ; v1@35.179,60.582 ccw(c35.179,61.632) 35.922,60.89 ccw(c36.664,60.147) v1@35.614,60.147 ; Header11.17@35.56,64.855 cw(c35.56,63.527) 36.499,64.466 cw(c37.438,65.405) Header11.17@36.11,65.405 ; v1@53.083,34.846 ccw(c52.341,34.103) 52.341,35.154 ccw(c52.341,36.204) v1@53.083,35.461
/CAMERA_HD: "The Ad-Flier!.9" Header11.19 | length 82.6
  Top Layer w0.375: 33.748,44.288 38.364,44.288
  Top Layer w0.4: 38.364,44.288 v1(40.081,42.57) ; v1@39.646,42.57 ccw(c38.596,42.57) 39.339,43.313 ccw(c40.081,44.056) v1@40.081,43.005
  Bottom Layer w0.4: Header11.19 34.976,67.361 37.273,67.361 37.968,68.055 57.091,68.055 59.142,66.004 59.142,43.22 58.493,42.57 v1(40.081,42.57) ; Header11.19@33.02,65.955 ccw(c33.02,67.283) 33.959,66.344 ccw(c34.898,65.405) Header11.19@33.57,65.405 ; v1@40.389,42.263 cw(c41.131,41.52) 41.131,42.57 cw(c41.131,43.621) v1@40.389,42.878
/CAMERA_RESET: "The Ad-Flier!.3" Header11.15 R22.2 | length 75.2
  Top Layer w0.375: 29.337,37.592 29.548,37.803 29.548,39.788
  Top Layer w0.4: 16.797,47.774 cw(c18.774,47.774) v1@17.376,49.172 ; 16.797,48.739 cw(c17.809,48.739) v1@17.094,49.454 ; v1(17.069,49.479) 16.797,49.208 16.797,44.45 17.145,44.102 17.551,44.102 19.501,42.153 19.501,35.395 20.955,33.941 R22.2 29.337,37.592 ; R22.2@28.982,33.711 ccw(c28.427,33.156) 28.427,33.941 ccw(c28.427,34.726) R22.2@28.982,34.171 ; R22.2@29.107,34.171 ccw(c28.552,34.726) 29.337,34.726 ccw(c30.122,34.726) R22.2@29.567,34.171
  Bottom Layer w0.4: v1(17.069,49.479) 23.354,55.765 30.345,55.765 31.492,54.618 36.052,54.618 39.37,57.936 39.37,64.135 Header11.15 ; v1@17.069,49.914 ccw(c17.069,50.964) 17.811,50.222 ccw(c18.554,49.479) v1@17.504,49.479 ; Header11.15@38.1,64.855 cw(c38.1,63.527) 39.039,64.466 cw(c39.978,65.405) Header11.15@38.65,65.405
/CAMERA_SCL: "The Ad-Flier!.4" Header11.11 R24.1 | length 88.3
  Top Layer w0.375: 30.448,36.481 30.448,39.788
  Top Layer w0.4: 30.448,36.481 32.512,34.417 ; 31.317,35.612 cw(c29.52,33.814) R24.1@32.062,33.814 ; 32,34.929 cw(c30.886,33.814) R24.1@32.462,33.814 ; v1@32.204,36.091 cw(c31.462,35.348) 32.512,35.348 cw(c33.562,35.348) v1@32.82,36.091 ; R24.1@32.282,34.044 ccw(c31.727,34.599) 32.512,34.599 ccw(c33.297,34.599) R24.1@32.742,34.044 ; R24.1 32.512,34.417 ; v1(32.512,36.398) 32.512,34.417 ; 32.512,34.417 ccw(c32.909,34.417) 32.691,34.085 cw(c32.909,34.417) 32.512,34.417 ; 32.512,34.417 cw(c32.115,34.417) 32.333,34.085 ccw(c32.115,34.417) 32.512,34.417
  Bottom Layer w0.4: v1(32.512,36.398) 34.062,36.398 36.868,39.204 36.868,42.053 38.735,43.92 57.785,43.92 58.442,44.577 58.442,65.383 57.15,66.675 44.45,66.675 Header11.11 ; v1@32.82,36.091 cw(c33.562,35.348) 33.562,36.398 cw(c33.562,37.448) v1@32.82,36.706 ; Header11.11@43.18,65.955 ccw(c43.18,67.283) 44.119,66.344 ccw(c45.058,65.405) Header11.11@43.73,65.405
/CAMERA_SDA: "The Ad-Flier!.5" Header11.13 R23.2 | length 96.9
  Top Layer w0.375: 31.348,39.788 31.348,38.629 v1@31.861,37.907 ; v1@31.355,38.006 ccw(c30.544,38.44) 31.406,38.761 ccw(c32.328,39.104) v1@31.931,38.205 ; 31.379,38.585 cw(c31,38.315) v1@31.382,38.05 ; 31.41,39.028 ccw(c32.356,38.868) v1@31.574,38.311 ; 31.468,38.46 ccw(c31.916,38.779) v1@31.825,38.236 ; v1(31.75,37.795) v1@31.861,37.907 ; v1@32.066,38.112 ccw(c32.561,38.607) 32.561,37.907 ; v1@32.073,37.485 cw(c33.061,36.537) 33.061,37.907 ; 35.814,35.154 33.061,37.907 ; v1@31.861,37.907 33.061,37.907
  Top Layer w0.4: R23.2@35.584,34.044 ccw(c35.029,34.599) 35.814,34.599 ccw(c36.599,34.599) R23.2@36.044,34.044 ; R23.2 35.814,35.154
  Bottom Layer w0.4: v1@31.442,37.488 ccw(c30.7,36.745) 30.7,37.795 ccw(c30.7,38.845) v1@31.442,38.103 ; v1(31.75,37.795) 14.03,37.795 7.058,44.767 7.058,46.672 8.03,47.644 18.947,47.644 25.668,54.365 28.945,54.365 30.092,53.218 37.892,53.218 41.91,57.236 41.91,64.135 Header11.13 ; Header11.13@40.64,64.855 cw(c40.64,63.527) 41.579,64.466 cw(c42.518,65.405) Header11.13@41.19,65.405
/CAMERA_VD: "The Ad-Flier!.8" Header11.21 | length 89
  Top Layer w0.375: 33.748,43.388 36.525,43.388
  Top Layer w0.4: 36.525,43.388 v1(39.172,40.742) ; v1@38.737,40.742 ccw(c37.686,40.742) 38.429,41.484 ccw(c39.172,42.227) v1@39.172,41.177
  Bottom Layer w0.4: Header11.21 33.83,68.755 57.407,68.755 59.842,66.32 59.842,42.24 58.344,40.742 v1(39.172,40.742) ; Header11.21@30.48,65.955 ccw(c30.48,67.283) 31.419,66.344 ccw(c32.358,65.405) Header11.21@31.03,65.405 ; v1@39.479,40.434 cw(c40.222,39.691) 40.222,40.742 cw(c40.222,41.792) v1@39.479,41.049
/GND: "The Ad-Flier!.7" "The Ad-Flier!.15" C50.2 C51.2 C52.2 C53.1 C54.2 C55.2 Header11.1 Header11.3 Header11.5 Header11.7 Header11.9 Module8.4 R22.1 R25.5 R25.6 R25.7 R25.8 R26.5 R26.6 R26.7 R26.8 | length 291.7
  Top Layer w0.375: R25.8@2.459,30.064 ccw(c2.224,30.299) 2.556,30.299 ccw(c2.888,30.299) R25.8@2.653,30.064 ; R25.5@2.459,32.42 cw(c2.224,32.185) 2.556,32.185 cw(c2.888,32.185) R25.5@2.653,32.42 ; R25.8 R25.7 2.565,30.842 2.565,31.642 R25.6 R25.5 ; 25.126,49.199 28.245,49.199 28.348,49.097 28.348,47.588 ; 33.748,42.488 35.033,42.488 38.151,39.37 ; R26.6@58.094,31.414 ccw(c58.107,31.412) R26.6@58.098,31.402 ; R26.5 58.587,30.913 ; R26.7 58.141,32.15 58.141,31.35 R26.6 ; R26.5@58.214,30.556 ccw(c57.716,30.915) R26.6 ; R26.5@58.46,30.5 cw(c58.914,30.586) 58.587,30.912 ; R26.6@58.461,31.337 ccw(c58.916,31.241) 58.587,30.913 ; 58.461,31.039 cw(c58.077,30.654) R26.5@58.517,30.336 ; R26.6 58.587,30.913
  Top Layer w0.4: 2.54,32.857 ccw(c2.896,32.857) R25.5@2.644,32.605 ; R25.5 2.54,32.517 2.54,48.641 3.175,49.276 6.579,49.276 9.763,46.091 9.763,38.751 17.018,31.496 R22.1@29.337,31.496 ; C51.2@24.588,51.199 ccw(c23.863,51.924) 24.889,51.924 ccw(c25.915,51.924) C51.2@25.19,51.199 ; C52.2@24.588,53.83 cw(c23.863,53.105) 24.889,53.105 cw(c25.915,53.105) C52.2@25.19,53.83 ; C51.2@24.592,50.144 cw(c23.898,49.436) 24.889,49.436 ; 25.126,49.199 24.889,49.436 ; C51.2@25.186,50.144 ccw(c25.88,49.436) 24.889,49.436 ; C52.2@25.19,54.055 cw(c25.915,53.33) 25.915,54.356 cw(c25.915,55.382) C52.2@25.19,54.657 ; v1(26.721,22.123) 26.721,26.579 29.337,29.195 R22.1@29.337,31.496 ; v1@27.355,52.518 ccw(c26.305,52.518) 27.048,53.26 ccw(c27.79,54.003) v1@27.79,52.953 ; v1(27.79,52.518) 25.952,54.356 C52.2 C51.2 24.889,49.436 ; R22.1@29.107,31.361 cw(c28.552,30.806) 29.337,30.806 cw(c30.122,30.806) R22.1@29.567,31.361 ; R22.1 R22.1@29.337,31.496 ; 38.151,39.37 39.621,39.37 40.256,38.735 C50.2 ; C50.2@39.955,36.812 cw(c39.23,36.087) 40.256,36.087 cw(c41.282,36.087) C50.2@40.557,36.812 ; C50.2@39.955,37.864 ccw(c39.23,38.589) 40.256,38.589 ccw(c41.282,38.589) C50.2@40.557,37.864 ; v1@40.256,30.734 C50.2 ; C50.2@40.304,37.985 ccw(c40.432,39.098) 41.224,38.306 ; C50.2@40.681,37.563 cw(c41.164,37.563) C50.2@40.822,37.904 ; v1@40.917,53.972 cw(c40.174,53.23) 41.224,53.23 cw(c42.274,53.23) v1@41.532,53.972 ; v1(41.224,54.28) 41.224,38.306 ; R26.8@58.051,33.044 ccw(c58.624,33.005) 58.448,32.458 ; R26.8@58.08,32.899 ccw(c59.016,33.38) 58.694,32.379 ; R26.7@58.122,32.363 cw(c58.349,32.189) 58.437,32.461 ; R26.7 58.15,32.553 ; R26.8 58.15,32.553 ; 58.218,32.531 cw(c58.094,32.145) R26.7@58.498,32.183 ; 58.227,32.528 cw(c58.107,32.154) R26.7@58.498,32.114 ; R26.7@58.44,32.12 cw(c58.827,31.823) v1@58.977,32.288 ; R26.8@58.45,33.016 ccw(c59.149,32.969) v1@58.935,32.301 ; R26.7@58.61,32.306 ccw(c58.642,32.976) v1@59.093,32.479 ; 58.676,32.468 ccw(c58.876,32.777) v1@59.109,32.493 ; 58.685,32.462 cw(c58.342,31.931) v1@58.96,32.065 ; v1@58.998,31.958 ccw(c58.064,31.478) 58.385,32.478 ccw(c58.707,33.478) v1@59.186,32.543 ; v1(59.385,32.156) 58.268,32.516 58.15,32.553 ; C50.2 41.224,38.306
  Bottom Layer w0.4: Module8.4@26.331,19.285 cw(c25.306,18.26) 26.755,18.26 cw(c28.204,18.26) Module8.4@27.179,19.285 ; Module8.4@26.721,19.743 v1(26.721,22.123) ; Module8.4 26.755,15.384 28.575,13.564 31.242,13.564 ; v1(27.79,52.518) 39.859,52.518 v1@41.423,54.081 ; v1@28.098,52.21 cw(c28.841,51.468) 28.841,52.518 cw(c28.841,53.568) v1@28.098,52.825 ; C55.2@29.211,12.684 cw(c29.852,12.56) 29.7,13.196 ; C55.2@29.237,12.751 cw(c30.182,12.17) 29.924,13.249 ; C55.2@29.266,12.788 ccw(c28.932,13.126) 29.407,13.126 ; C55.2@29.407,12.046 cw(c29.407,11.571) C55.2@29.743,11.907 ; C55.2@29.548,12.788 cw(c29.882,13.126) 29.407,13.126 ; C55.2@29.577,12.541 cw(c31.346,11.454) 30.864,13.473 ; C55.2@29.603,12.608 cw(c30.52,12.432) 30.303,13.34 ; C55.2@29.607,12.246 ccw(c30.098,12.246) C55.2@29.751,11.899 ; 31.892,14.214 ccw(c30.767,15.339) C53.1@32.357,15.395 ; C53.1@31.957,15.381 cw(c29.512,15.294) 31.242,13.564 ; C53.1@32.19,15.017 cw(c32.031,14.704) 32.382,14.704 ; C53.1 32.382,14.704 ; C53.1@32.574,15.017 ccw(c32.733,14.704) 32.382,14.704 ; 40.201,52.86 ccw(c38.781,54.28) v1@40.789,54.28 ; v1(40.259,30.734) 40.183,30.658 40.183,27.619 C54.2 ; 40.884,53.542 ccw(c40.146,54.28) v1@41.189,54.28 ; v1(41.224,54.28) v1@41.423,54.081 ; v1@41.224,54.315 ccw(c41.224,55.358) 41.962,54.62 ; v1@41.224,54.715 ccw(c41.224,56.723) 42.644,55.303 ; C54.2@42.99,24.21 cw(c42.265,23.485) 43.291,23.485 cw(c44.317,23.485) 43.592,24.21 cw(c44.317,23.485) 44.317,24.511 cw(c44.317,25.537) C54.2@43.592,24.812 ; Header11.9@45.17,65.405 cw(c43.842,65.405) 44.781,64.466 cw(c45.72,63.527) Header11.9@45.72,64.855 ; Header11.9@46.109,65.016 cw(c47.048,64.077) 47.048,65.405 cw(c47.048,66.733) Header11.9@46.109,65.794 ; Header11.7@47.871,65.016 ccw(c46.932,64.077) 46.932,65.405 ccw(c46.932,66.733) Header11.7@47.871,65.794 ; Header11.7@48.649,65.016 cw(c49.588,64.077) 49.588,65.405 cw(c49.588,66.733) Header11.7@48.649,65.794 ; Header11.5@50.411,65.016 ccw(c49.472,64.077) 49.472,65.405 ccw(c49.472,66.733) Header11.5@50.411,65.794 ; Header11.5@51.189,65.016 cw(c52.128,64.077) 52.128,65.405 cw(c52.128,66.733) Header11.5@51.189,65.794 ; Header11.3@52.951,65.016 ccw(c52.012,64.077) 52.012,65.405 ccw(c52.012,66.733) Header11.3@52.951,65.794 ; Header11.3@53.729,65.016 cw(c54.668,64.077) 54.668,65.405 cw(c54.668,66.733) Header11.3@53.729,65.794 ; Header11.1@55.491,65.016 ccw(c54.552,64.077) 54.552,65.405 ccw(c54.552,66.733) Header11.1@55.491,65.794 ; Header11.1 Header11.3 Header11.5 Header11.7 Header11.9 44.45,64.135 44.45,57.109 v1@41.423,54.081 ; v1@59.078,31.849 ccw(c58.335,31.106) 58.335,32.156 ccw(c58.335,33.207) v1@59.078,32.464 ; v1(59.385,32.156) 55.744,32.156 48.099,24.511 C54.2 ; 29.407,13.126 31.242,13.564 ; 29.407,13.126 C55.2 29.407,12.243 30.304,11.346 32.715,11.346 43.291,21.922 C54.2 ; 31.242,13.564 32.382,14.704
/ULTRASONIC_EDGE: Header11.16 Module8.3 | length 76.9
  Top Layer w0.4: v1@29.21,22.479 35.814,22.479 37.77,20.523 47.32,20.523 47.65,20.853 47.65,51.943 41.605,57.988 v1(37.795,57.988) ; v1@38.103,57.681 cw(c38.845,56.938) 38.845,57.988 cw(c38.845,59.038) v1@38.103,58.296
  Bottom Layer w0.4: Module8.3@29.261,19.743 v1(29.261,22.504) ; v1@37.488,58.296 ccw(c36.009,59.774) 38.1,59.774 ; Header11.16@37.711,62.476 cw(c36.772,61.537) 38.1,61.537 cw(c39.428,61.537) Header11.16@38.489,62.476 ; v1@37.77,58.013 ccw(c36.975,58.809) 38.1,58.809 ; v1(37.795,57.988) 38.1,58.293 Header11.16
/ULTRASONIC_TRIGGER: Header11.14 Module8.2 | length 90.2
  Bottom Layer w0.4: Module8.2 31.835,26.712 28.697,29.85 21.694,29.85 18.314,33.23 17.145,33.23 6.358,44.017 6.358,47.601 7.101,48.344 17.78,48.344 24.501,55.065 29.645,55.065 30.792,53.918 37.44,53.918 40.64,57.118 Header11.14 ; Header11.14@40.251,62.476 cw(c39.312,61.537) 40.64,61.537 cw(c41.968,61.537) Header11.14@41.029,62.476
NetLED4_2: LED4.1 LED4.4 R26.4 | length 27.6
  Top Layer w0.4: LED4.1@55.878,11.272 ccw(c55.543,12.054) 56.333,11.738 ; LED4.1 56.337,11.747 57.796,13.206 ; 56.134,30.135 cw(c56.49,30.135) R26.4@56.238,30.387 ; R26.4 56.134,30.475 56.134,28.27 57.796,26.608 LED4.4 57.796,13.206 ; 56.267,11.571 ccw(c56.821,11.349) LED4.1@56.272,11.114 ; 56.796,12.207 ccw(c55.107,13.896) LED4.4@57.496,13.896 ; 57.479,12.889 ccw(c56.472,13.896) LED4.4@57.896,13.896 ; LED4.4@57.584,14.308 ccw(c57.072,14.82) 57.796,14.82 ccw(c58.52,14.82) LED4.4@58.008,14.308 ; LED4.4@57.591,13.677 cw(c57.153,13.206) 57.796,13.206 ; LED4.4@58.001,13.677 ccw(c58.439,13.206) 57.796,13.206
NetLED5_2: LED5.N R25.4 | length 16.2
  Top Layer w0.4: 4.318,32.971 ccw(c4.835,32.971) R25.4@4.469,32.605 ; v1@4.318,40.157 4.318,32.517 R25.4
  Bottom Layer w0.4: v1(4.242,40.157) 4.242,47.93 LED5.N
NetLED6_2: LED6.1 LED6.4 R26.3 | length 91.7
  Top Layer w0.375: 54.991,30.779 55.562,31.35 R26.3
  Top Layer w0.4: LED6.1@2.825,10.838 cw(c2.313,10.326) 3.037,10.326 cw(c3.761,10.326) LED6.1@3.249,10.838 ; LED6.1@2.825,10.938 ccw(c2.313,10.426) 2.313,11.15 ccw(c2.313,11.874) LED6.1@2.825,11.362 ; LED6.4@4.625,14.562 ccw(c4.113,15.074) 4.837,15.074 ccw(c5.561,15.074) LED6.4@5.049,14.562 ; LED6.4 4.837,15.153 4.445,15.545 2.54,15.545 2.032,15.037 2.032,11.15 LED6.1 3.037,4.445 3.799,3.683 29.82,3.683 v1(38.125,11.989) ; v1@37.69,11.989 cw(c36.64,11.989) 37.383,11.246 cw(c38.125,10.504) v1@38.125,11.554 ; v1@54.683,29.162 ccw(c53.941,29.905) 54.991,29.905 ccw(c56.041,29.905) v1@55.299,29.162 ; v1(54.991,28.854) 54.991,30.779
  Bottom Layer w0.4: v1(38.125,11.989) v1(54.991,28.854) ; v1@38.125,12.424 ccw(c38.125,13.474) 38.868,12.731 ccw(c39.611,11.989) v1@38.56,11.989 ; v1@54.556,28.854 cw(c53.506,28.854) 54.248,28.112 cw(c54.991,27.369) v1@54.991,28.419
NetLED7_2: LED7.N R25.3 | length 71.3
  Top Layer w0.375: R25.3 5.715,31.642
  Top Layer w0.4: 5.715,31.642 8.193,34.12 v1(8.193,45.441) ; v1@7.885,45.133 cw(c7.143,44.39) 8.193,44.39 cw(c9.243,44.39) v1@8.501,45.133
  Bottom Layer w0.4: v1@8.193,45.006 cw(c8.193,43.955) 8.936,44.698 cw(c9.678,45.441) v1@8.628,45.441 ; v1(8.193,45.441) 9.531,44.102 23.871,44.102 26.479,46.711 55.651,46.711 LED7.N ; LED7.N@56.242,45.72 ccw(c55.276,45.72) 55.959,46.403 ccw(c56.642,47.086) LED7.N@56.642,46.12
NetLED8_2: LED8.N R25.2 | length 68.7
  Top Layer w0.375: R25.2 5.988,30.842
  Top Layer w0.4: 5.988,30.842 7.62,29.21 7.62,21.361 15.672,13.31 45.999,13.31 v1@52.908,6.401
  Bottom Layer w0.4: v1(52.883,6.375) LED8.N@56.845,2.413
NetLED9_2: LED9.1 LED9.4 R26.2 | length 84.7
  Top Layer w0.375: v1@51.213,32.15 R26.2 ; v1@51.447,31.916 cw(c52.011,31.352) 52.011,32.15 ; v1@51.447,32.549 ccw(c52.41,33.512) 52.41,32.15
  Top Layer w0.4: LED9.1 2.413,55.219 2.413,54.737 3.048,54.102 4.445,54.102 4.953,54.61 4.953,58.319 ; LED9.4 4.953,58.319 ; LED9.4@4.16,58.107 cw(c4.672,57.595) 4.672,58.319 cw(c4.672,59.043) LED9.4@4.16,58.531 ; v1@17.269,34.62 ccw(c16.219,34.62) 16.961,35.363 ccw(c17.704,36.105) v1@17.704,35.055 ; v1(17.704,34.62) 14.58,37.744 14.58,43.814 6.46,51.934 6.46,56.939 4.953,58.319 ; v1(51.13,32.233) v1@51.213,32.15
  Bottom Layer w0.4: v1(17.704,34.62) 23.952,34.62 26.34,32.233 v1(51.13,32.233) ; v1@18.011,34.313 cw(c18.754,33.57) 18.754,34.62 cw(c18.754,35.67) v1@18.011,34.928 ; v1@50.823,31.925 ccw(c50.08,31.182) 50.08,32.233 ccw(c50.08,33.283) v1@50.823,32.54
NetLED10_2: LED10.N R25.1 | length 27.5
  Top Layer w0.4: R25.1 5.796,29.967 6.553,29.21 v1@6.553,9.804
  Bottom Layer w0.4: LED10.N 6.528,7.29 v1(6.528,9.804)
NetLED11_2: LED11.1 LED11.4 R26.1 | length 39
  Top Layer w0.4: R26.1 55.524,33.025 55.524,53.594 55.879,53.949 LED11.4 57.52,53.34 ; LED11.4@57.308,53.737 ccw(c56.796,53.225) 56.796,53.949 ccw(c56.796,54.673) LED11.4@57.308,54.161 ; LED11.4@57.375,53.587 cw(c57.238,53.34) 57.52,53.34 ; LED11.4@57.42,53.849 ccw(c58.407,53.849) 57.709,53.151 ; LED11.4@57.665,53.587 ccw(c57.802,53.34) 57.52,53.34 ; LED11.4@57.82,53.849 ccw(c59.773,53.849) 58.392,52.468 ; LED11.1@59.25,57.02 cw(c59.643,56.62) 60.04,57.017 ; LED11.1 60.008,57.049 ; LED11.1@59.53,56.735 cw(c59.926,56.332) 60.325,56.732 ; LED11.1@59.54,56.845 cw(c60.007,56.411) 60.007,57.049 ; LED11.1@59.54,57.253 ccw(c60.007,57.687) 60.007,57.049 ; 57.52,53.34 58.409,52.451 59.69,52.451 60.325,53.086 60.325,56.732 ; 60.008,57.049 60.325,56.732
pads on no net: Header11.12 Header11.18 Header11.20 Header11.22 Header11.24 Module8.NC

## Keep-outs
Top Layer:
  lines w0.254: 5.969,61.214 57.404,61.214 57.404,67.056 57.277,66.929 5.969,66.929 5.969,61.214 ; 25.019,40.132 26.289,38.862 27.051,38.862 27.051,40.513 26.543,41.021 26.543,41.402 25.019,41.402 25.019,40.132 ; 25.019,46.482 26.543,46.482 26.543,46.99 27.559,46.99 27.559,48.514 27.051,48.514 25.019,46.482 ; 32.131,38.862 33.401,38.862 34.671,40.132 34.671,40.894 33.274,40.894 33.274,40.64 33.02,40.386 32.131,40.386 32.131,38.862 ; 32.639,46.99 32.639,48.514 33.274,48.514 34.544,47.244 34.544,45.974 33.147,45.974 33.147,46.863 33.02,46.99 32.639,46.99
Keep-Out Layer:
  lines w0.254: 0,0 60.96,0 60.96,69.469 0,69.469 0,0

## Text inside footprints (layer, text, board x,y; h text height)
C54: Top Overlay "+" at 38.316,23.761 h1.5
Header11: Top Overlay "1" at 58.42,65.913 h1.27 r180; Top Overlay "2" at 58.547,63.373 h1.27 r180; Top Overlay "40" at 5.588,63.373 h1.27 r180; Top Overlay "39" at 5.588,65.913 h1.27 r180